# Altium PCB WL1800-E-D001-PrinterC Rev.2.0.PcbDoc (part 1 of 2)
Units mil, origin at the board's own origin, x right, y up, seen from the top; angles counter-clockwise.
Board outline 5519 x 3937.77 mil, 2 copper layers (Top Layer, Bottom Layer); 232 components, 142 nets, 822 pads, 384 vias.
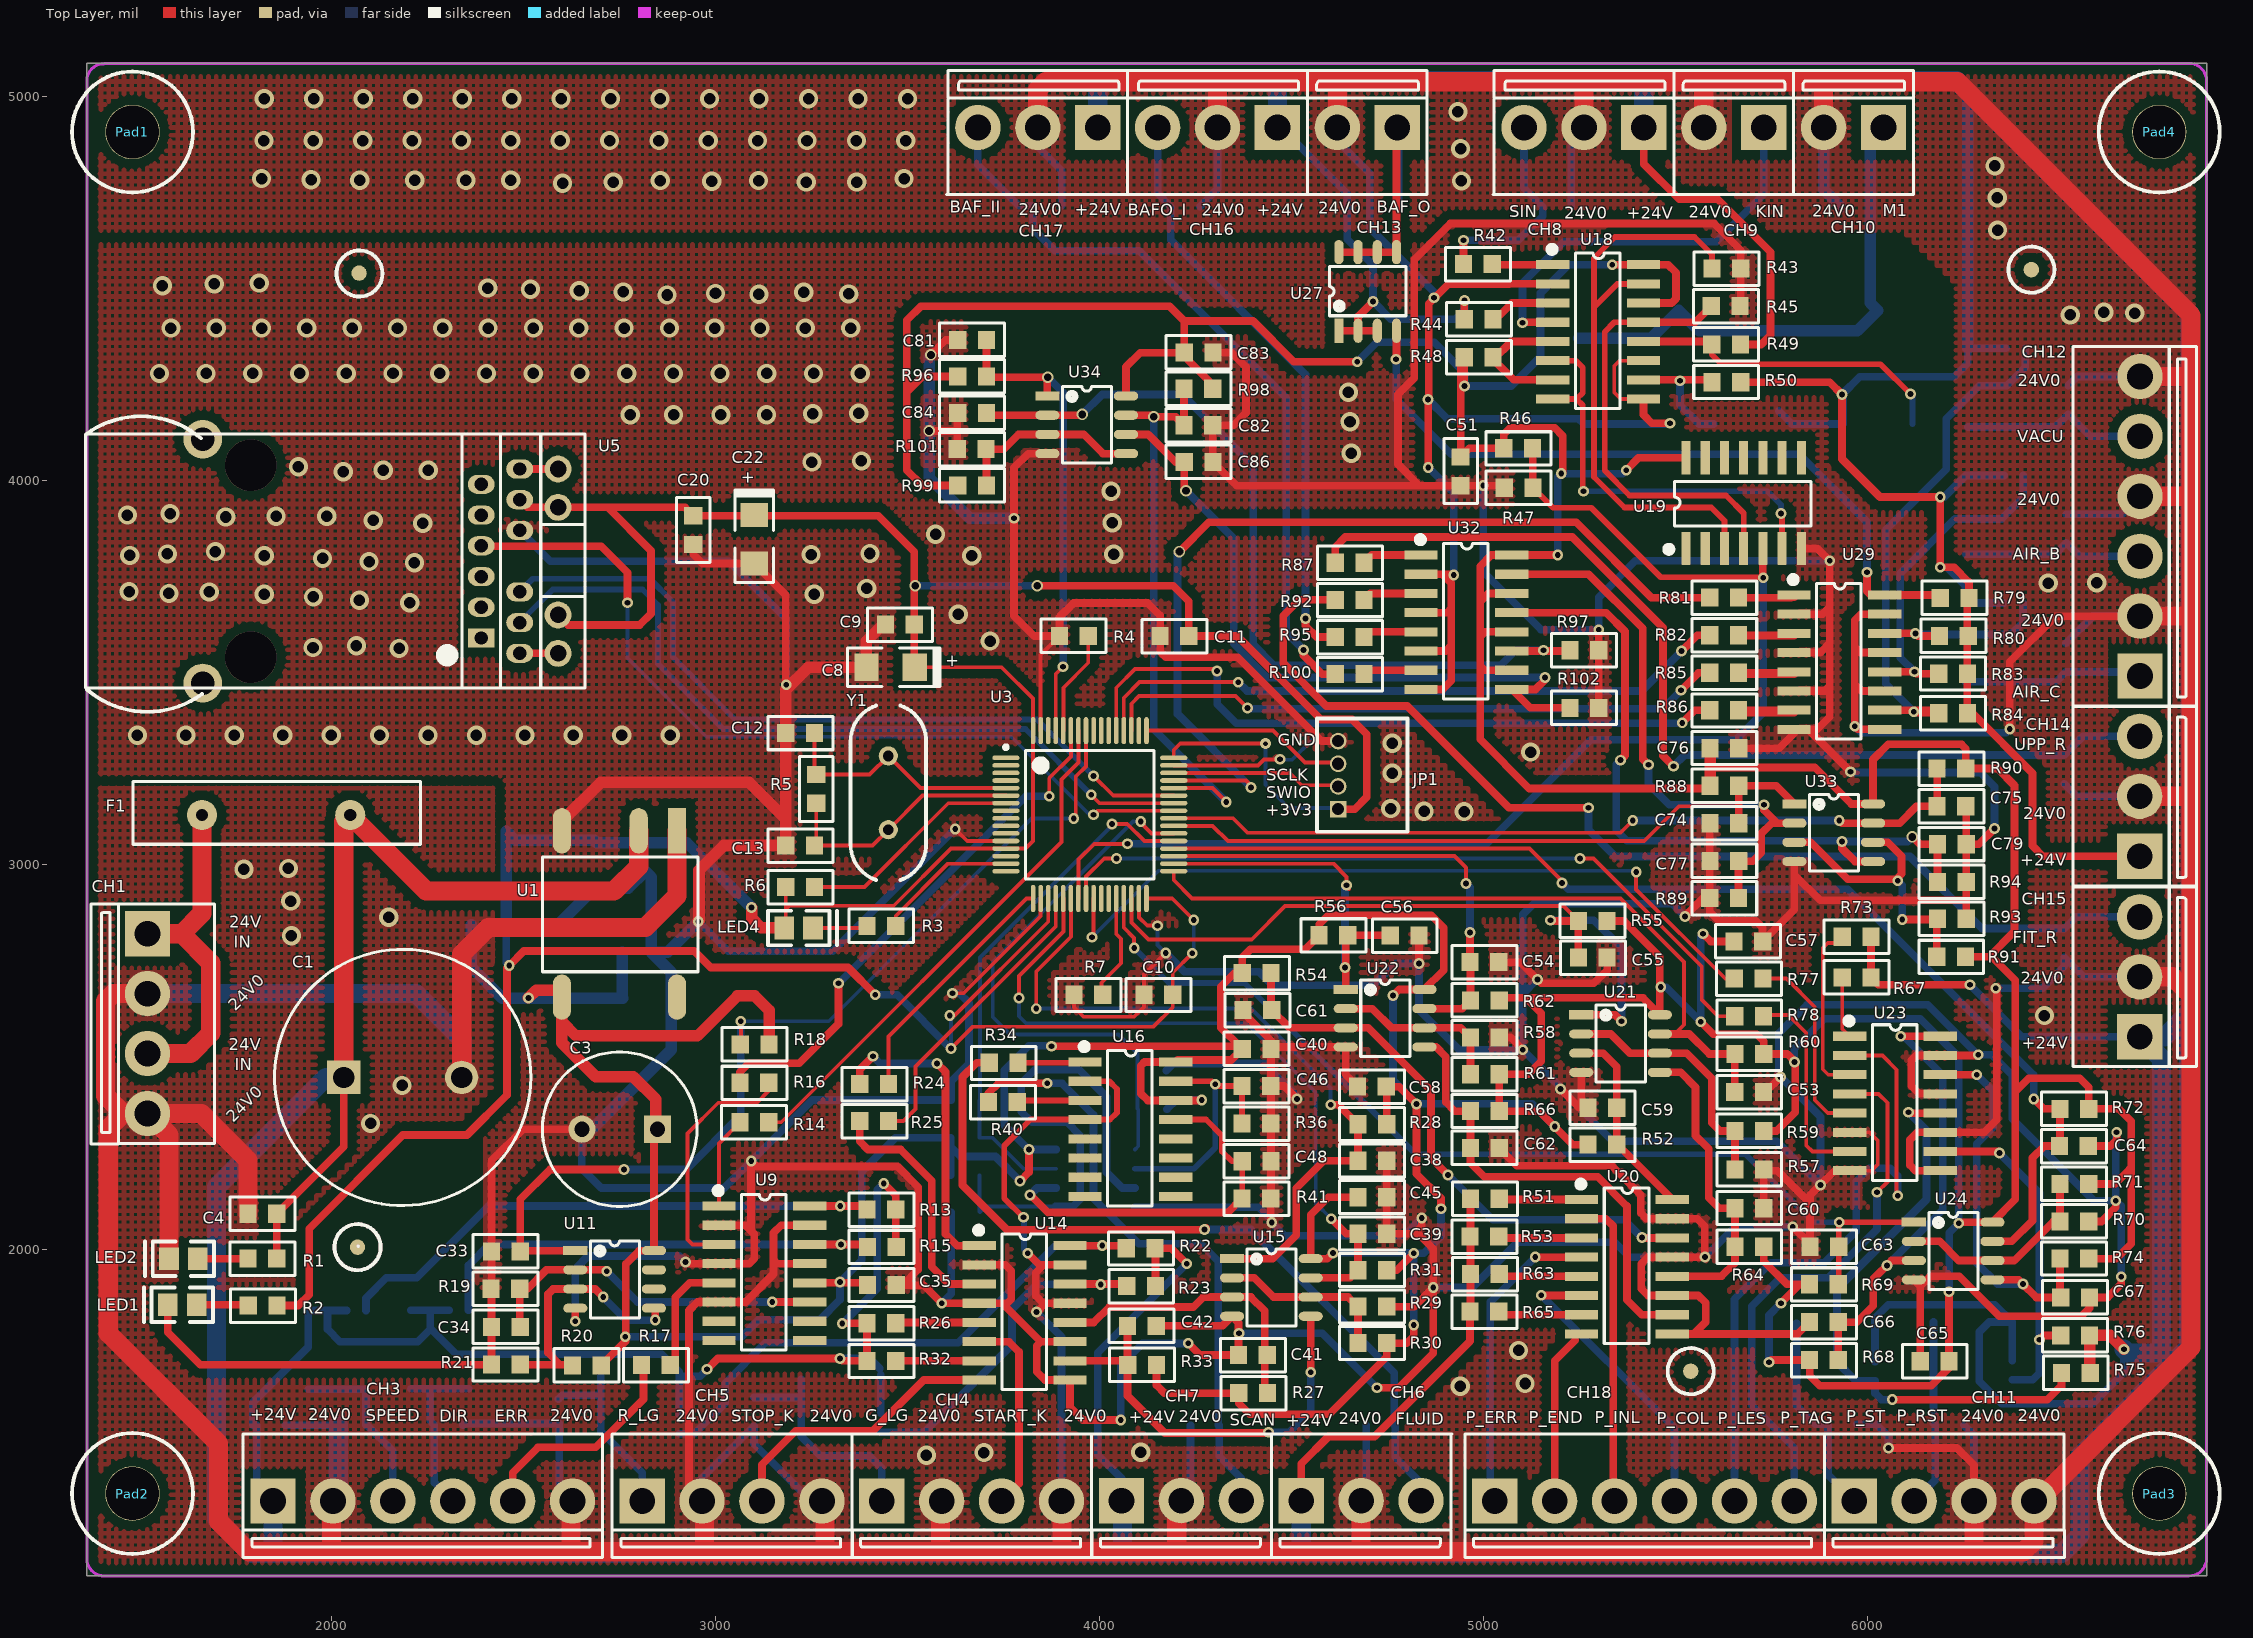
[diagram p0: Top Layer view]
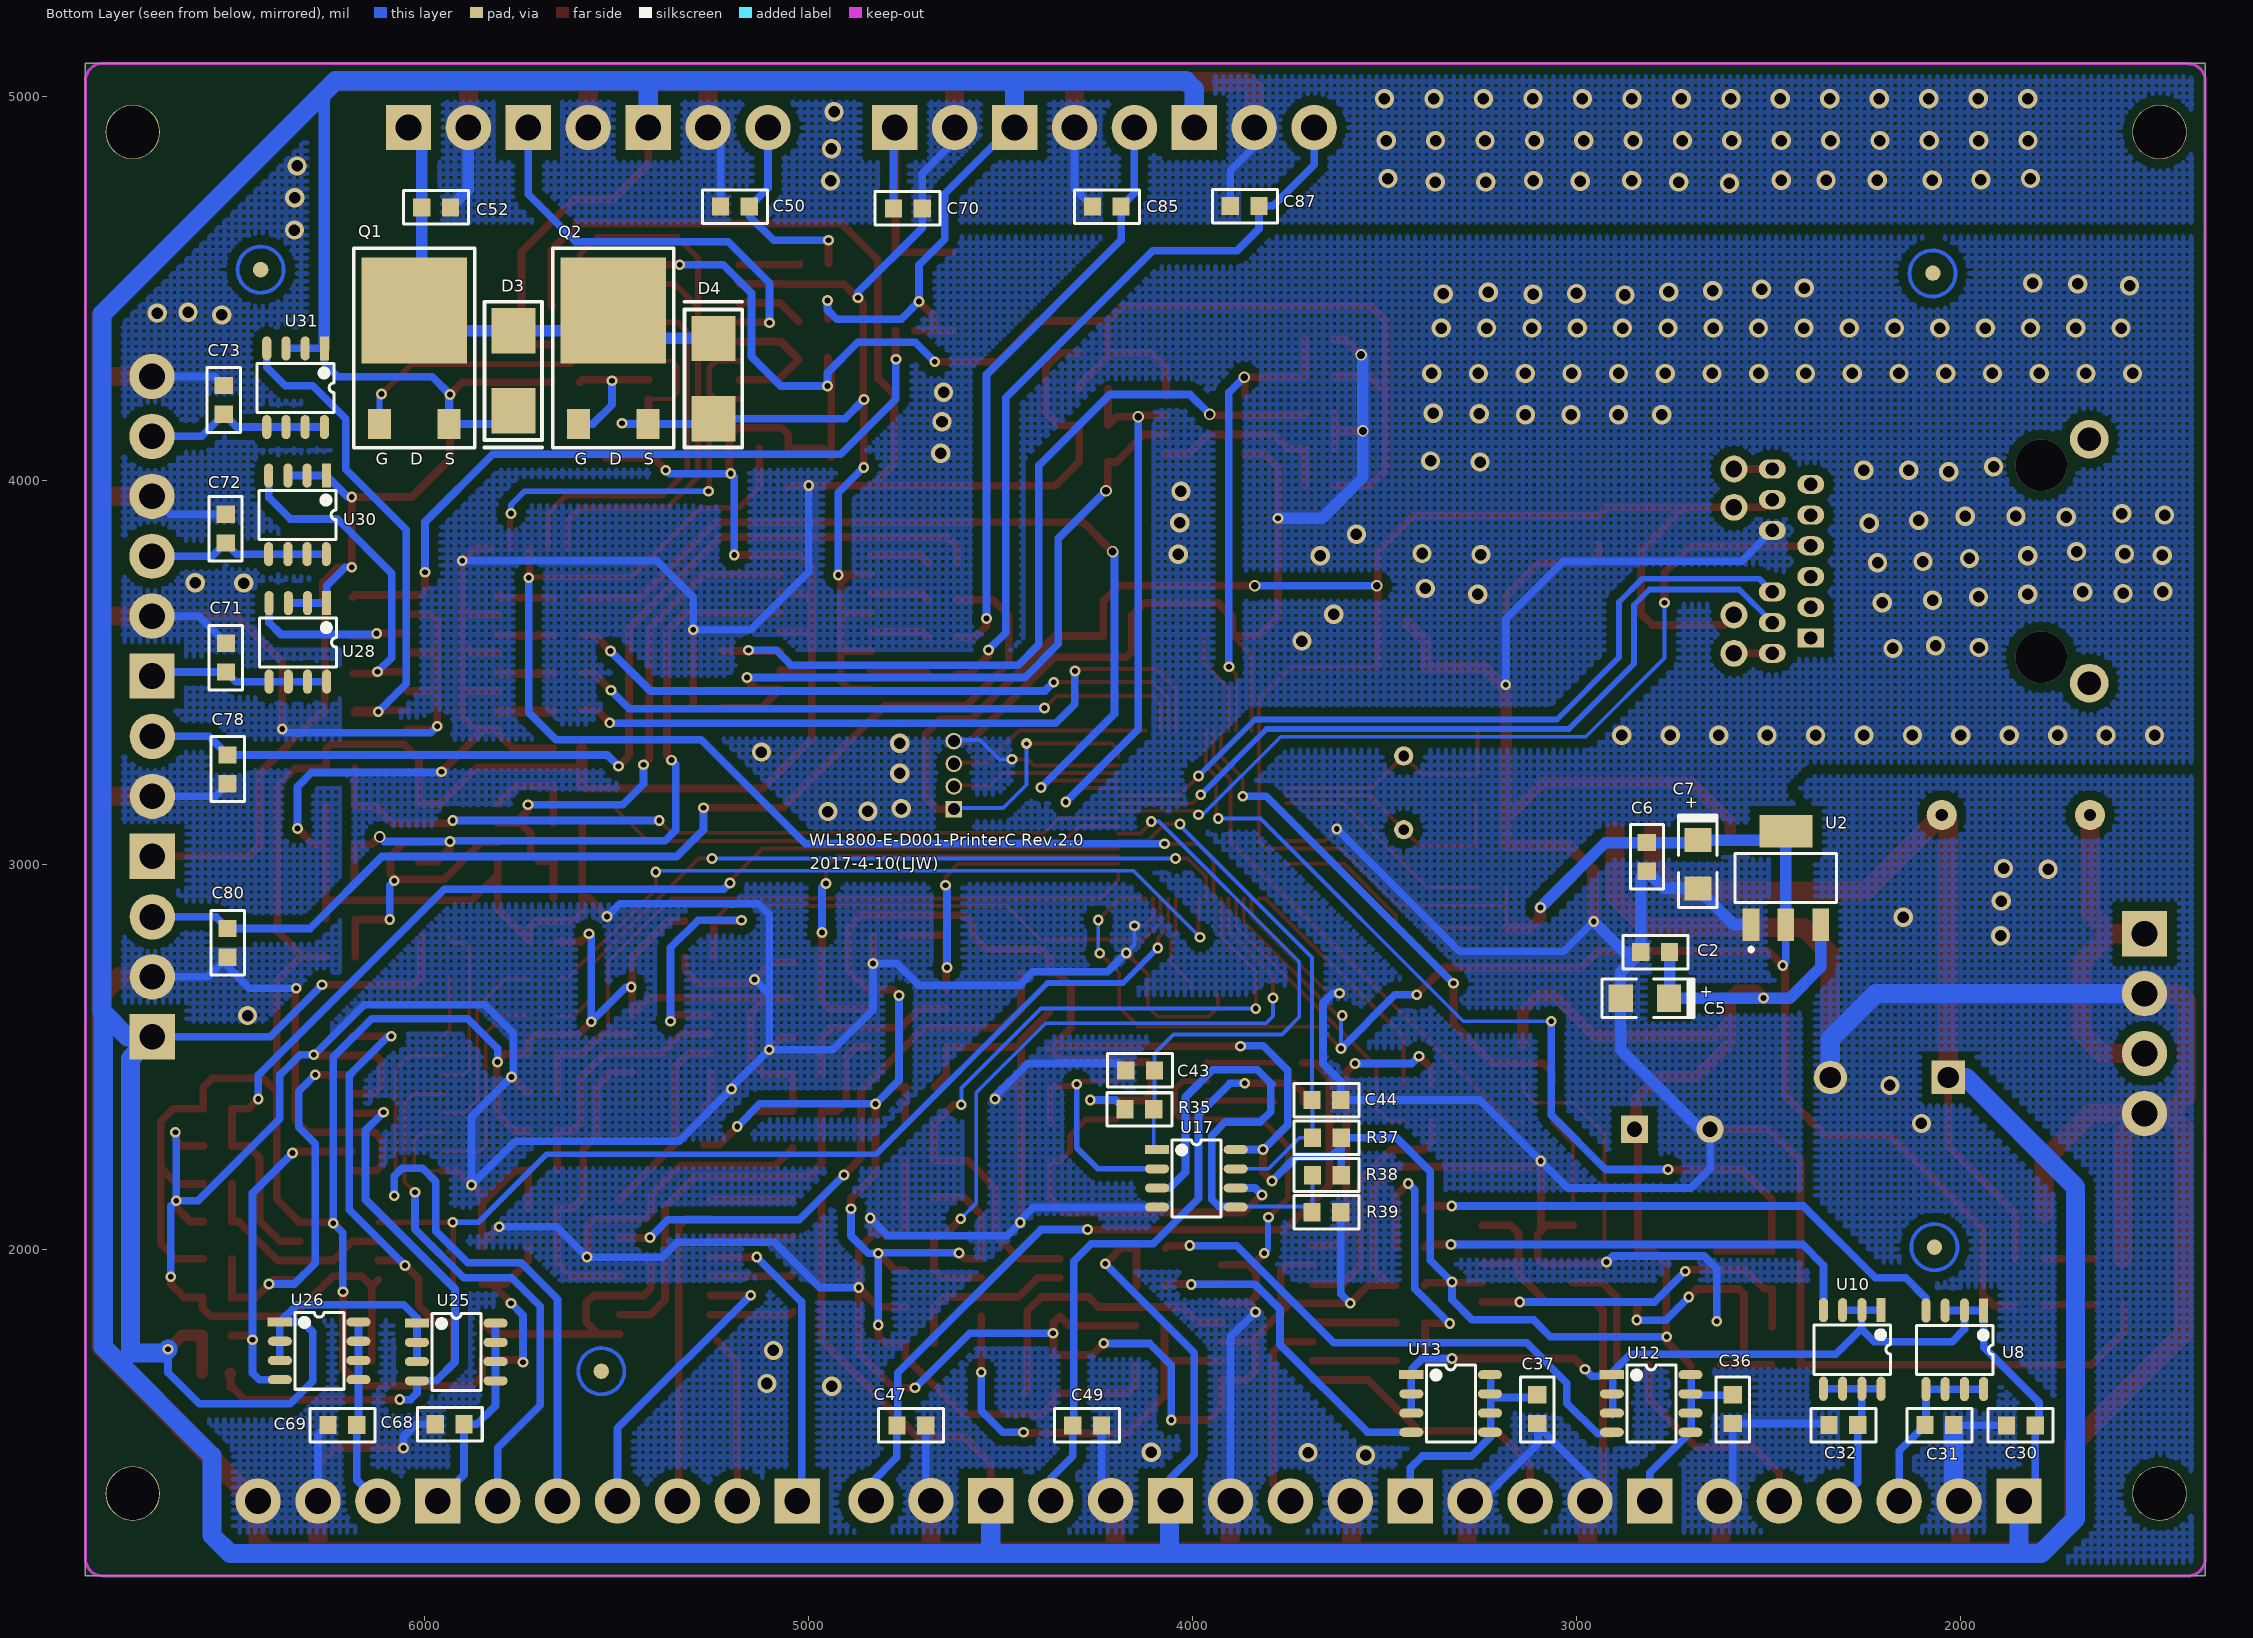
[diagram p1: Bottom Layer view, seen from below]

## Layer stack, top to bottom
Top Solder: solder mask 0.4, Solder Resist, Dk 3.5
Top Layer: signal copper 1.4
Dielectric 1: dielectric 12.6, FR-4, Dk 4.8
Bottom Layer: signal copper 1.4
Bottom Solder: solder mask 0.4, Solder Resist, Dk 3.5

## Board outline
1363,1149 1363,5086.77 6882,5086.77 6882,1149

## Design rules (kind name [scope] priority, off if disabled: settings)
Clearance Clearance_1 [InPolygon] p1: gap=23.62
Clearance [All] p2: gap=6
ComponentClearance [All] p1: gap=0 collisioncheckmode=3 verticalgap=0 showdistances=FALSE
PolygonConnect [All] p1: connectstyle=Direct reliefconductorwidth=10 reliefentries=4 polygonreliefangle="90 Angle" airgapwidth=10
RoutingVias [All] p1: holewidth=28 width=50 viastyle="Through Hole" minholewidth=28 minwidth=50 maxholewidth=28 maxwidth=50
SolderMaskExpansion [All] p1: expansion=4
Width [All] p1: maxlimit=236.22 minlimit=10 preferedwidth=236.22
28 further rules are at their usual default settings.

## Classes and differential pairs
component class roll_motorl_control: C50 C51 C52 CH8 CH9 CH10 D3 D4 Q1 Q2 R42 R43 R44 R45 R46 R47 R48 R49 R50 U18 U19
component class printer_control: C53 C54 C55 C56 C57 C58 C59 C60 C61 C62 C63 C64 C65 C66 C67 C68 C69 CH11 CH18 R51 R52 R53 R54 R55 R56 R57 R58 R59 R60 R61 R62 R63 R64 R65 R66 R67 R68 R69 R70 R71 R72 R73 R74 R75 R76 R77 R78 U20 U21 U22 U23 U24 U25 U26
component class power: C1 C2 C3 C4 C5 C6 C7 CH1 F1 LED1 LED2 R1 R2 U1 U2
component class light_key_control: C36 C37 C38 C39 C40 C41 C42 C43 C44 C45 C46 C47 C48 C49 CH4 CH5 CH6 CH7 R22 R23 R24 R25 R26 R27 R28 R29 R30 R31 R32 R33 R34 R35 R36 R37 R38 R39 R40 R41 U12 U13 U14 U15 U16 U17
component class cpu: C8 C9 C10 C11 C12 C13 JP1 LED4 Pad1 Pad2 Pad3 Pad4 R3 R4 R5 R6 R7 U3 Y1
component class communition: C20 C22 U5
component class belt_motor_control: C30 C31 C32 C33 C34 C35 CH3 R13 R14 R15 R16 R17 R18 R19 R20 R21 U8 U9 U10 U11
component class air_cylinder_control: C70 C71 C72 C73 C74 C75 C76 C77 C78 C79 C80 C81 C82 C83 C84 C85 C86 C87 CH12 CH13 CH14 CH15 CH16 CH17 R79 R80 R81 R82 R83 R84 R85 R86 R87 R88 R89 R90 R91 R92 R93 R94 R95 R96 R97 R98 R99 R100 R101 R102 U27 U28 U29 U30 U31 U32 U33 U34

## Components (designator, comment, footprint, x,y, rotation, side; value= is the part's Value field where it differs from the comment)
C1 "C_2200uF" C7.8*17 2032,2447 r0 top
C2 "Capb" 0805 2795,2773 r180 bottom
C3 "C_2200uF" C5*10 2849,2312 r180 top
C4 "Cap" 0805 1820,2092 r0 top
C5 "Cap Pol3b" "CAP A-3216" 2822,2653 r0 bottom
C6 "Capb" 0805 2817,3021 r90 bottom
C7 "Cap Pol3b" "CAP A-3216" 2684,3002 r270 bottom
C8 "Cap Pol3" "CAP A-3216" 3456,3515 r180 top
C9 "Cap" 0805 3480,3626 r0 top
C10 "Cap" 0805 4153,2662 r0 top
C11 "Cap" 0805 4195,3596 r0 top
C12 "Cap" 0805 3220.46,3344 r0 top
C13 "Cap" 0805 3220.46,3051 r0 top
C20 "Cap" 0805 2942,3872 r90 top
C22 "Cap Pol3" "CAP A-3216" 3101,3848 r270 top
C30 "Capb" 0805 1843,1541 r0 bottom
C31 "Capb" 0805 2055,1542 r180 bottom
C32 "Capb" 0805 2305,1542 r180 bottom
C33 "Cap" 0805 2454,1994 r180 top
C34 "Cap" 0805 2454,1797.33 r180 top
C35 "Cap" 0805 3433,1906 r180 top
C36 "Capb" 0805 2593,1583 r270 bottom
C37 "Capb" 0805 3102,1583 r270 bottom
C38 "Cap" 0805 4710,2230 r180 top
C39 "Cap" 0805 4710,2040 r180 top
C40 "Cap" 0805 4409,2521 r180 top
C41 "Cap" 0805 4399,1724 r0 top
C42 "Cap" 0805 4110,1800 r180 top
C43 "Capb" 0805 4136,2465 r0 bottom
C44 "Capb" 0805 3651,2388 r180 bottom
C45 "Cap" 0805 4710,2135 r180 top
C46 "Cap" 0805 4408,2424.5 r0 top
C47 "Capb" 0805 4732,1541 r0 bottom
C48 "Cap" 0805 4409,2228.5 r180 top
C49 "Capb" 0805 4274,1541 r0 bottom
C50 "Capb" 0805 5191,4714 r180 bottom
C51 "Cap" 0805 4940,4025 r90 top
C52 "Capb" 0805 5969,4712 r0 bottom
C53 "Cap" 0805 5691,2408.6 r0 top
C54 "Cap" 0805 5002,2747 r0 top
C55 "Cap" 0805 5284,2759 r0 top
C56 "Cap" 0805 4794,2816 r0 top
C57 "Cap" 0805 5689,2801 r180 top
C58 "Cap" 0805 4709,2423 r0 top
C59 "Cap" 0805 5309,2368 r0 top
C60 "Cap" 0805 5692,2106.4 r180 top
C61 "Cap" 0805 4411,2622 r0 top
C62 "Cap" 0805 5003,2263 r180 top
C63 "Cap" 0805 5887,2006 r180 top
C64 "Cap" 0805 6537,2268.2 r0 top
C65 "Cap" 0805 6174,1708 r0 top
C66 "Cap" 0805 5886,1809.67 r0 top
C67 "Cap" 0805 6540,1874 r180 top
C68 "Capb" 0805 5934,1544 r180 bottom
C69 "Capb" 0805 6213,1542 r180 bottom
C70 "Capb" 0805 4741,4709 r0 bottom
C71 "Capb" 0805 6516,3540 r270 bottom
C72 "Capb" 0805 6517,3876 r270 bottom
C73 "Capb" 0805 6522,4211 r270 bottom
C74 "Cap" 0805 5627,3108.5 r180 top
C75 "Cap" 0805 6218,3153 r0 top
C76 "Cap" 0805 5627,3304 r180 top
C77 "Cap" 0805 5627,3010.75 r180 top
C78 "Capb" 0805 6512,3249 r90 bottom
C79 "Cap" 0805 6219,3054 r180 top
C80 "Capb" 0805 6512,2797 r90 bottom
C81 "Cap" 0805 3668,4367 r180 top
C82 "Cap" 0805 4257,4145 r0 top
C83 "Cap" 0805 4258,4334 r180 top
C84 "Cap" 0805 3668,4177 r180 top
C85 "Capb" 0805 4223,4714 r180 bottom
C86 "Cap" 0805 4258,4049 r180 top
C87 "Capb" 0805 3864,4716 r180 bottom
CH1 "HEADER1X4" CH3.96-4PIN 1521,2821 r270 top
CH3 "HEADER1X6" CH3.96-6PIN 1848,1345 r0 top locked
CH4 "HEADER1X4" CH3.96-4PIN 3433,1344 r0 top locked
CH5 "HEADER1X4" CH3.96-4PIN 2809,1344 r0 top locked
CH6 "HEADER1X3" CH3.96-3PIN 4525,1345 r0 top locked
CH7 "HEADER1X3" CH3.96-3PIN 4057,1345 r0 top locked
CH8 "HEADER1X3" CH3.96-3PIN 5417,4920 r180 top locked
CH9 "HEADER1X2" CH3.96-2PIN 5729,4920 r180 top locked
CH10 "HEADER1X2" CH3.96-2PIN 6041,4920 r180 top locked
CH11 "HEADER1X4" CH3.96-4PIN 5965,1344 r0 top locked
CH12 "HEADER1X6" CH3.96-6PIN 6708,3492 r90 top
CH13 "HEADER1X2" CH3.96-2PIN 4775,4920 r180 top locked
CH14 "HEADER1X3" CH3.96-3PIN 6708,3023 r90 top
CH15 "HEADER1X3" CH3.96-3PIN 6708,2553 r90 top
CH16 "HEADER1X3" CH3.96-3PIN 4463,4920 r180 top locked
CH17 "HEADER1X3" CH3.96-3PIN 3995,4920 r180 top locked
CH18 "HEADER1X6" CH3.96-6PIN 5029,1345 r0 top locked
D3 "1N5822(SS34)b" SMA 5768,4390.9 r270 bottom (schematic designator D2)
D4 "1N5822(SS34)b" SMA 5247,4162.24 r90 bottom (schematic designator D3)
F1 "X30_UF500" X30UF600 1663,3130 r0 top
JP1 "4 HEADER" CON4_1.5 4621,3234 r90 top
LED1 "" LED-0805 1649,1855 r180 top
LED2 "" LED-0805 1652,1975 r180 top
LED4 "Ready" LED-0805 3179,2836 r0 top
Pad1 "Pad" pad35 1481,4908.46 r0 top
Pad2 "Pad" pad35 1481,1363.46 r0 top
Pad3 "Pad" pad35 6758,1363.46 r0 top
Pad4 "Pad" pad35 6758,4908.46 r0 top
Q1 "FR5305 (PMOS-2)b" TO-252 6026,4296 r180 bottom
Q2 "FR4105 (NMOS-2)b" TO-252 5508,4296 r180 bottom
R1 "Res2" 0805 1820,1975 r0 top
R2 "Res2" 0805 1821,1853 r0 top
R3 "Res2" 0805 3432,2841 r180 top
R4 "Res2" 0805 3933,3596 r180 top
R5 "Res2" 0805 3262.46,3198 r270 top
R6 "Res2" 0805 3220.46,2943 r0 top
R7 "Res2" 0805 3971,2662 r0 top
R13 "Res2" 0805 3432,2103 r0 top
R14 "Res2" 0805 3101,2330 r180 top
R15 "Res2" 0805 3433,2005 r180 top
R16 "Res2" 0805 3101,2433 r0 top
R17 "Res2" 0805 2845,1698 r0 top
R18 "Res2" 0805 3102,2533 r180 top
R19 "Res2" 0805 2453,1896.67 r0 top
R20 "Res2" 0805 2665,1697 r180 top
R21 "Res2" 0805 2454,1699 r180 top
R22 "Res2" 0805 4107,2002 r0 top
R23 "Res2" 0805 4108,1904 r0 top
R24 "Res2" 0805 3413,2430 r0 top
R25 "Res2" 0805 3413,2333 r0 top
R26 "Res2" 0805 3432,1807 r0 top
R27 "Res2" 0805 4400,1625 r0 top
R28 "Res2" 0805 4710,2325 r180 top
R29 "Res2" 0805 4710,1850 r180 top
R30 "Res2" 0805 4710,1755 r180 top
R31 "Res2" 0805 4710,1945 r180 top
R32 "Res2" 0805 3432,1709 r0 top
R33 "Res2" 0805 4111,1698 r180 top
R34 "Res2" 0805 3750,2485 r0 top
R35 "Res2b" 0805 4138,2364 r180 bottom
R36 "Res2" 0805 4408,2327 r0 top
R37 "Res2b" 0805 3650,2289.67 r0 bottom
R38 "Res2b" 0805 3650,2192.33 r0 bottom
R39 "Res2b" 0805 3651,2096 r180 bottom
R40 "Res2" 0805 3748,2383 r0 top
R41 "Res2" 0805 4408,2132 r0 top
R42 "Res2" 0805 4985,4565 r0 top
R43 "Res2" 0805 5632,4553 r0 top
R44 "Res2" 0805 4987,4421 r0 top
R45 "Res2" 0805 5630,4455 r0 top
R46 "Res2" 0805 5090,4085 r0 top
R47 "Res2" 0805 5091,3982 r180 top
R48 "Res2" 0805 4987,4322 r0 top
R49 "Res2" 0805 5631,4355 r180 top
R50 "Res2" 0805 5632,4257 r180 top
R51 "Res2" 0805 5003,2131 r0 top
R52 "Res2" 0805 5309,2272 r0 top
R53 "Res2" 0805 5002,2033 r0 top
R54 "Res2" 0805 4409,2719 r0 top
R55 "Res2" 0805 5284,2854 r180 top
R56 "Res2" 0805 4609,2817 r0 top
R57 "Res2" 0805 5692,2206.8 r180 top
R58 "Res2" 0805 5003,2551 r180 top
R59 "Res2" 0805 5692,2307.2 r180 top
R60 "Res2" 0805 5692,2508 r180 top
R61 "Res2" 0805 5003,2455 r180 top
R62 "Res2" 0805 5003,2647 r180 top
R63 "Res2" 0805 5003,1935 r0 top
R64 "Res2" 0805 5692,2006 r180 top
R65 "Res2" 0805 5002,1837 r0 top
R66 "Res2" 0805 5003,2359 r180 top
R67 "Res2" 0805 5971,2707 r180 top
R68 "Res2" 0805 5886,1711 r0 top
R69 "Res2" 0805 5886,1908.33 r0 top
R70 "Res2" 0805 6538,2071.6 r180 top
R71 "Res2" 0805 6538,2169.4 r180 top
R72 "Res2" 0805 6538,2365 r180 top
R73 "Res2" 0805 5971,2813 r180 top
R74 "Res2" 0805 6538,1975 r180 top
R75 "Res2" 0805 6542,1677 r180 top
R76 "Res2" 0805 6540,1775 r180 top
R77 "Res2" 0805 5690,2704 r0 top
R78 "Res2" 0805 5691,2606 r0 top
R79 "Res2" 0805 6226,3695 r180 top
R80 "Res2" 0805 6224,3596 r180 top
R81 "Res2" 0805 5626,3696 r0 top
R82 "Res2" 0805 5626,3598.25 r0 top
R83 "Res2" 0805 6222,3498 r180 top
R84 "Res2" 0805 6222,3395 r180 top
R85 "Res2" 0805 5626,3500.5 r0 top
R86 "Res2" 0805 5626,3402.75 r0 top
R87 "Res2" 0805 4651,3787 r0 top
R88 "Res2" 0805 5627,3206.25 r180 top
R89 "Res2" 0805 5626,2914 r0 top
R90 "Res2" 0805 6218,3251 r0 top
R91 "Res2" 0805 6217,2761 r0 top
R92 "Res2" 0805 4651,3690.33 r0 top
R93 "Res2" 0805 6219,2860 r180 top
R94 "Res2" 0805 6219,2956 r180 top
R95 "Res2" 0805 4651,3593.67 r0 top
R96 "Res2" 0805 3668,4272 r180 top
R97 "Res2" 0805 5262,3559 r180 top
R98 "Res2" 0805 4257,4240 r0 top
R99 "Res2" 0805 3668,3988 r180 top
R100 "Res2" 0805 4651,3497 r0 top
R101 "Res2" 0805 3667,4083 r0 top
R102 "Res2" 0805 5262,3409 r180 top
U1 "B2405XT-2WR2" B2405XT-2WR2 2900,3089 r270 top
U2 "AMS1117-3.3b" SOT223 2455,2966 r180 bottom
U3 "STM32F103RBT6" LQFP64 3756,3279 r0 top
U5 "USR-K3" USR-K3 2390,3591 r180 top
U8 "CEM4435Ab" SOP8-OP27 1940,1840 r270 bottom
U9 "TLP280-4" SO16 3127,1937 r0 top
U10 "CEM4435Ab" SOP8-OP27 2207,1841 r270 bottom
U11 "LM293" SOP8-OP27 2635,1996 r0 top
U12 "CEM4435Ab" SOP8-OP27 2908,1673 r180 bottom
U13 "CEM4435Ab" SOP8-OP27 3430,1673 r180 bottom
U14 "TLP280-4" SO16 3805,1834 r0 top
U15 "LM293" SOP8-OP27 4345,1975 r0 top
U16 "TLP280-4" SO16 4080,2312 r0 top
U17 "LM293b" SOP8-OP27 4092,2259 r180 bottom
U18 "TLP280-4" SO16 5298,4388 r0 top
U19 "74HC10" SO14 5677,3942 r90 top
U20 "TLP280-4" SO16 5373,1954 r0 top
U21 "LM293" SOP8-OP27 5254,2610 r0 top
U22 "LM293" SOP8-OP27 4641,2676 r0 top
U23 "TLP280-4" SO16 6071,2379 r0 top
U24 "LM293" SOP8-OP27 6120,2070 r0 top
U25 "CEM4435Ab" SOP8-OP27 6019,1807 r180 bottom
U26 "CEM4435Ab" SOP8-OP27 6376,1810 r180 bottom
U27 "CEM4435A" SOP8-OP27 4623,4391 r90 top
U28 "CEM4435Ab" SOP8-OP27 6254,3682 r270 bottom
U29 "TLP280-4" SO16 5926,3528 r0 top
U30 "CEM4435Ab" SOP8-OP27 6255,4014 r270 bottom
U31 "CEM4435Ab" SOP8-OP27 6260,4345 r270 bottom
U32 "TLP280-4" SO16 4955,3632 r0 top
U33 "LM293" SOP8-OP27 5809,3159 r0 top
U34 "LM293" SOP8-OP27 3864,4221 r0 top
Y1 "8MHz" XTAL_US 3450,3284 r270 top

## Footprints (in the part's own frame and the unit in brackets; to place one, negate y for a bottom-side part, rotate by r counter-clockwise, add the part's x,y. Pads: shape width x height; smd on the part's side, far side on the other; paste and mask are expansions set on the pad)
0805 [mm] "1.14mm,1.2mm,3.05mm"
  rect 1.14x1.2 smd: 1(-0.95,0) 2(0.95,0)
  silkscreen extent -2.13,-1.12 2.16,1.09
B2405XT-2WR2 [mm]
  rect 3x1.2 smd: 1(0,0)
  oval 3x1.2 smd: 2(0,-2.54) 4(0,-7.62) 5(11,-7.62) 8(11,0)
  silkscreen extent 1.73,-8.89 9.32,1.37
C5*10 [mm]
  rect 1.8x1.8 hole 1: 1(0,0)
  round 1.8 hole 1: 2(5,0)
  silkscreen extent -2.62,-5.11 7.62,5.11
C7.8*17 [mm]
  rect 2.2x2.2 hole 1.4: 1(0,0)
  round 2.2 hole 1.4: 2(7.8,0)
  silkscreen extent -4.57,-8.47 12.37,8.47
"CAP A-3216" [mm]
  rect 1.6x1.8 smd: 1(-1.6,0) 2(1.6,0)
  silkscreen extent -3.25,-1.27 2.85,1.27
CH3.96-2PIN [mm]
  rect 3x3 hole 1.7: 1(0,0)
  round 3 hole 1.7: 2(3.96,0)
  silkscreen extent -1.98,-3.76 5.94,4.42
CH3.96-3PIN [mm]
  rect 3x3 hole 1.7: 1(0,0)
  round 3 hole 1.7: 2(3.96,0) 3(7.92,0)
  silkscreen extent -1.98,-3.76 9.98,4.42
CH3.96-4PIN [mm]
  rect 3x3 hole 1.7: 1(0,0)
  round 3 hole 1.7: 2(3.96,0) 3(7.92,0) 4(11.887,0)
  silkscreen extent -1.98,-3.73 13.89,4.45
CH3.96-6PIN [mm]
  rect 3x3 hole 1.7: 1(0,-0.025)
  round 3 hole 1.7: 2(3.96,-0.025) 3(7.92,-0.025) 4(11.887,-0.025) 5(15.847,-0.025) 6(19.807,-0.025)
  silkscreen extent -1.98,-3.76 21.79,4.42
CON4_1.5 [mm]
  rect 1.1x1.1 hole 0.8: 1(-2.25,0)
  round 1.1 hole 0.8: 2(-0.75,0) 3(0.75,0) 4(2.25,0)
  silkscreen extent -3.75,-4.6 3.75,1.4
LED-0805 [mm]
  rect 1.3x1.5 smd: 1(0,0) 2(1.9,0)
  silkscreen extent -1.08,-1.14 3.49,1.14
LQFP64 [mm] "Thin QFP, 64-Leads, Body 10x10mm, Pitch 0.5mm, IPC Medium Density"
  oval 1.8x0.3 smd: 1(0,0) 2(0,-0.5) 3(0,-1) 4(0,-1.5) 5(0,-2) 6(0,-2.5) 7(0,-3) 8(0,-3.5) 9(0,-4) 10(0,-4.5) 11(0,-5) 12(0,-5.5) 13(0,-6) 14(0,-6.5) 15(0,-7) 16(0,-7.5) 33(11.1,-7.5) 34(11.1,-7) 35(11.1,-6.5) 36(11.1,-6) 37(11.1,-5.5) 38(11.1,-5) 39(11.1,-4.5) 40(11.1,-4) 41(11.1,-3.5) 42(11.1,-3) 43(11.1,-2.5) 44(11.1,-2) 45(11.1,-1.5) 46(11.1,-1) 47(11.1,-0.5) 48(11.1,0)
  oval 0.3x1.8 smd: 17(1.8,-9.3) 18(2.3,-9.3) 19(2.8,-9.3) 20(3.3,-9.3) 21(3.8,-9.3) 22(4.3,-9.3) 23(4.8,-9.3) 24(5.3,-9.3) 25(5.8,-9.3) 26(6.3,-9.3) 27(6.8,-9.3) 28(7.3,-9.3) 29(7.8,-9.3) 30(8.3,-9.3) 31(8.8,-9.3) 32(9.3,-9.3) 49(9.3,1.8) 50(8.8,1.8) 51(8.3,1.8) 52(7.8,1.8) 53(7.3,1.8) 54(6.8,1.8) 55(6.3,1.8) 56(5.8,1.8) 57(5.3,1.8) 58(4.8,1.8) 59(4.3,1.8) 60(3.8,1.8) 61(3.3,1.8) 62(2.8,1.8) 63(2.3,1.8) 64(1.8,1.8)
  silkscreen extent -0.12,-8 9.8,0.82, body extent 0.55,-8.75 10.55,1.25, height 1.6
pad35 [mm]
  round 3.6 hole 3.5: 1(0.025,0)
  silkscreen extent -3.97,-4 4.03,4
SMA [mm]
  rect 3x2.9 smd: 1(0,0) 2(5.3,0)
  silkscreen extent -1.92,-1.91 7.73,1.91
SO14 [mm] "Wide = 6mm"
  rect 2.2x0.6 smd: 1(-3,3.81) 2(-3,2.54) 3(-3,1.27) 4(-3,0) 5(-3,-1.27) 6(-3,-2.54) 7(-3,-3.81) 8(3,-3.81) 9(3,-2.54) 10(3,-1.27) 11(3,0) 12(3,1.27) 13(3,2.54) 14(3,3.81)
  silkscreen extent -3.23,-4.44 1.45,5.13
SO16 [mm] "Wide = 6mm"
  rect 2.2x0.6 smd: 1(-3,4.445) 2(-3,3.175) 3(-3,1.905) 4(-3,0.635) 5(-3,-0.635) 6(-3,-1.905) 7(-3,-3.175) 8(-3,-4.445) 9(3,-4.445) 10(3,-3.175) 11(3,-1.905) 12(3,-0.635) 13(3,0.635) 14(3,1.905) 15(3,3.175) 16(3,4.445)
  silkscreen extent -3.23,-5.08 1.45,5.64
SOP8-OP27 [mm]
  rect 1.6x0.6 smd: 1(0,0)
  oval 1.6x0.6 smd: 2(0,-1.27) 3(0,-2.54) 4(0,-3.81) 5(5.2,-3.81) 6(5.2,-2.54) 7(5.2,-1.27) 8(5.2,0)
  silkscreen extent 0.99,-4.45 4.24,0.63
SOT223 [mm] "SOT-223/SC-73; 4 Leads; Body 6.7 x 7.3 mm, inc. leads (LxW max)"
  rect 1.1x2.15 smd: 1(-2.3,-3.1) 2(0,-3.1) 3(2.3,-3.1)
  rect 3.5x2.15 smd: 4(0,3.1)
  silkscreen extent -3.35,-4.85 3.35,1.63
TO-252 [mm]
  rect 1.5x2 smd: 1(-2.3,-3.75) 3(2.3,-3.75)
  rect 7x7 smd: 2(0,3.75)
  silkscreen extent -4,-5.32 4,7.87
USR-K3 [mil]
  rect 70x50 hole 35: 1(0,0)
  oval 70x50 hole 35: 2(0,-80) 3(0,-160) 4(0,-240) 5(0,-320) 6(0,-400) 7(-100,40) 8(-100,-40) 9(-100,-120) 10(-100,-280) 11(-100,-360) 12(-100,-440)
  round 70 hole 43: 13(-200,40) 14(-200,-60) 15(-200,-340) 16(-200,-440)
  round 101.18 hole 61.81: 17(725,117.5) 17(725,-517.5)
  silkscreen extent -270,-577 1030,192
X30UF600 [mm]
  round 2 hole 0.8: 1(0,0) 2(9.804,0)
  silkscreen extent -4.57,-1.93 14.45,2.21
XTAL_US [mil]
  round 50 hole 28: 1(0,0) 2(192.13,0)
  silkscreen extent -131,-98 323,98

## Part data
C2 C6 C30 C31 C32 C36 C37 C43 C44 C47 C49 C50 C52 C68 C69 C70 C71 C72 C73 C78 C80 C85 C87: library part Cap, "Capacitor"
C4 C9 C10 C11 C12 C13 C20 C33 C34 C35 C38 C39 C40 C41 C42 C45 C46 C48 C51 C53 C54 C55 C56 C57 C58 C59 C60 C61 C62 C63 C64 C65 C66 C67 C74 C75 C76 C77 C79 C81 C82 C83 C84 C86: "Capacitor"
C5 C7: library part "Cap Pol3", "Polarized Capacitor (Surface Mount)"
C8 C22: "Polarized Capacitor (Surface Mount)"
D3 D4: library part "Diode 1N4148", "High Conductance Fast Diode"
F1: library part "Fuse 1", "Fuse"
JP1: "4 Pin Header"
LED1 LED2 LED4: library part LED2, "Typical RED, GREEN, YELLOW, AMBER GaAs LED"
Q1: library part PMOS-2, "P-Channel Power MOSFET"
Q2: library part NMOS-2, "N-Channel Power MOSFET"
R1 R2 R3 R4 R5 R6 R7 R13 R14 R15 R16 R17 R18 R19 R20 R21 R22 R23 R24 R25 R26 R27 R28 R29 R30 R31 R32 R33 R34 R36 R40 R41 R42 R43 R44 R45 R46 R47 R48 R49 R50 R51 R52 R53 R54 R55 R56 R57 R58 R59 R60 R61 R62 R63 R64 R65 R66 R67 R68 R69 R70 R71 R72 R73 R74 R75 R76 R77 R78 R79 R80 R81 R82 R83 R84 R85 R86 R87 R88 R89 R90 R91 R92 R93 R94 R95 R96 R97 R98 R99 R100 R101 R102: "Resistor"
R35 R37 R38 R39: library part Res2, "Resistor"
U2: library part AMS1117-5
U3: library part STM32F103RDT6
U8 U10 U12 U13 U25 U26 U28 U30 U31: library part CEM4435A
U9 U14 U16 U18 U20 U23 U29 U32: library part TLP521-4
U17: library part LM293
U19: "three input nand gain"
Y1: library part XTAL, "Crystal Oscillator"

## Free pads (board coordinates)
  round 40 smd: 0(2068,2005) 0(2072,4541) 0(5539,1682) 0(6426,4550)
  round 40 smd far side: 0(2068,2005) 0(2072,4541) 0(5539,1682) 0(6426,4550)
  round 120 on Top Solder: 1(2068,2005) 1(2073,4540) 1(5539,1682) 1(6426,4550)
  round 120 on Bottom Solder: 1(2068,2005) 1(2072,4540) 1(5539,1682) 1(6426,4550)

## Via types
v1: diameter 28, hole 15, Top Layer to Bottom Layer, 192 vias
v2: diameter 50, hole 30, Top Layer to Bottom Layer, 179 vias
v3: diameter 30, hole 20, Top Layer to Bottom Layer, 10 vias
v4: diameter 133.86, hole 133.86, Top Layer to Bottom Layer, 2 vias
v5: diameter 28, hole 12, Top Layer to Bottom Layer, 1 vias

## Nets (pads, with @x,y where several pads share a name; then routed paths per layer and width w, separated by ;. In a path a pad name is that pad's centre, name@x,y a point inside that pad or via, vN(x,y) a via of type N, cw(c..) or ccw(c..) an arc to the next point about the centre after c; other vN are vias at no path point)
24V0: C1.2 C4.1 C30.2 C31.2 C32.1 C36.2 C37.2 C47.1 C49.1 C50.1 C52.1 C68.1 C69.1 C70.1 C71.1 C72.1 C73.1 C78.1 C80.1 C85.1 C87.1 CH1.2 CH1.4 CH3.2 CH3.6 CH4.2 CH4.4 CH5.2 CH5.4 CH6.2 CH7.2 CH8.2 CH9.2 CH10.2 CH11.3 CH11.4 CH12.2 CH12.4 CH12.6 CH13.2 CH14.2 CH15.2 CH16.2 CH17.2 D4.1 LED2.2 Q2.3 U1.1 U9.6 U9.13 U9.15 U14.13 U14.15 U16.2 U16.4 U18.2 U18.9 U18.11 U23.9 U23.11 U29.9 U29.11 U29.13 U29.15 U32.2 U32.4 U32.6 U32.8 | length 31498.1
  Top Layer w10: U18.9@5416.11,4213 5357,4213 5340,4230 5340,4299 5354,4313 U18.11@5416.11,4313
  Top Layer w15: v1(3802,2083) 3802,2082 3752,2132 3752,2269 3820,2337 U16.4@3961.89,2337 4027,2337 4045,2355 4045,2417 4025,2437 U16.2@3961.89,2437
  Top Layer w20: CH5.2@2964.91,1344 2931,1377.91 2931,1840 2953,1862 U9.6@3008.89,1862 3078,1862 3151,1935 3151,1972 ; U9.13@3245.11,1962 3161,1962 3151,1972 ; U9.15@3245.11,2062 3171,2062 3151,2042 3151,1972 ; v1(3813,1989) 3843,1959 3855,1959 ; v1(3836,1836) 3859,1859 ; U14.13@3923.11,1859 3859,1859 ; U14.15@3923.11,1959 3855,1959 ; U32.8@4836.89,3457 4893,3457 4916,3480 4916,3572 ; U32.6@4836.89,3557 4901,3557 4916,3572 ; U32.4@4836.89,3657 4905,3657 4916,3668 ; U32.2@4836.89,3757 4920,3757 v1(4922,3755) ; v1(4856,4035) 4856,4211 v1(4855,4212) 4857,4214 4857,4461 4908,4512 5067,4512 5068,4513 U18.2@5179.89,4513 ; 4895,3755 4916,3734 4916,3668 ; U18.9@5416.11,4213 5416.11,4171.89 5438,4150 v1(5485,4150) ; U29.9@6044.11,3353 5974,3353 v1(5966,3361) 5966,3471 ; U29.11@6044.11,3453 5984,3453 5966,3471 ; U29.13@6044.11,3553 5981,3553 5966,3568 ; U29.15@6044.11,3653 5982,3653 5966,3637 5966,3568 ; v1(6054,1482) 6232,1482 6276.81,1437.19 CH11.3@6276.81,1344 ; U23.9@6189.11,2204 6124,2204 6109,2219 6109,2284 6129,2304 U23.11@6189.11,2304 6303,2304 6336,2337 6336,2676 v1(6333,2679) ; v1(6370,3354) 6370,3529 6488.91,3647.91 CH12.2@6709,3647.91 ; 3855,1959 3834,1938 3834,1878 3853,1859 3859,1859 ; 4916,3572 4916,3668 ; 5966,3471 5966,3568
  Top Layer w50: CH1.2@1521,2665.09 1432.09,2665.09 1412,2645 1412,2399 1458,2353 ; LED2.2@1577.2,1975 1577.2,2296.8 CH1.4@1521,2353 ; C4.1@1782.6,2092 1782.6,2231.4 1661,2353 CH1.4@1521,2353 ; CH3.2@2003.91,1344 2000,1340.09 2000,1212 ; C1.2@2339.09,2447 2339.09,2768.09 2408,2837 2817,2837 2900,2920 U1.1@2900,3089 ; CH3.6@2627.81,1344 2624,1340.19 2624,1212 ; CH5.2@2964.91,1344 2971,1337.91 2971,1212 ; CH5.4@3277,1344 3285,1336 3285,1212 ; CH4.2@3588.91,1344 3586,1341.09 3586,1212 ; CH17.2@3839.09,4920 3839.09,5019.09 3859,5039 4625,5039 ; CH4.4@3901,1344 3902,1343 3902,1212 ; CH7.2@4212.91,1345 4201,1333.09 4201,1212 ; CH16.2@4307.09,4920 4307.09,5036.09 ; CH13.2@4619.09,4920 4619.09,5033.09 4625,5039 ; CH6.2@4680.91,1345 4681,1344.91 4681,1212 ; CH8.2@5261.09,4920 5261.09,5028.09 5272,5039 ; CH9.2@5573.09,4920 5573.09,5037.09 5575,5039 ; CH10.2@5885.09,4920 5885.09,5038.09 5886,5039 ; CH11.3@6276.81,1344 6276.81,1212 ; CH15.2@6708,2708.91 6793.09,2708.91 6842,2660 ; CH14.2@6708,3178.91 6840.09,3178.91 6842,3177 ; CH12.2@6709,3647.91 6833.91,3647.91 6842,3656 ; CH12.4@6709,3960 6839,3960 6842,3957 ; CH12.6@6709,4271.81 6836.19,4271.81 6842,4266 ; 1458,2353 1419,2314 1419,1781 1706,1494 1706,1291 1785,1212 2000,1212 ; 1458,2353 CH1.4@1521,2353 ; 2000,1212 2624,1212 ; 2624,1212 2971,1212 ; 2971,1212 3285,1212 ; 3285,1212 3586,1212 ; 3586,1212 3902,1212 ; 3902,1212 4201,1212 ; 4201,1212 4681,1212 ; 4625,5039 5272,5039 ; 4681,1212 6276.81,1212 ; 5272,5039 5575,5039 ; 5575,5039 5886,5039 ; 5886,5039 6234,5039 6842,4431 6842,4266 ; 6276.81,1212 6405,1212 6433,1240 CH11.4@6433,1344 6442,1344 6842,1744 6842,2660 ; 6842,2660 6842,3177 ; 6842,3177 6842,3656 ; 6842,3656 6842,3957 ; 6842,3957 6842,4266
  Bottom Layer w15: v1(3802,2083) 3803,2082 3803,1999 v1(3813,1989)
  Bottom Layer w20: C30.2@1880.4,1541 1998.6,1541 C31.2@2007.6,1532 ; C32.1@2342.4,1542 2346,1545.6 C36.2@2593,1545.6 2593,1378.81 CH3.6@2627.81,1344 ; CH5.2@2956.91,1395.5 3100,1538.6 3100,1493 CH5.4@3269,1324 ; v1(3836,1836) 3901,1771 CH4.4@3901,1344 ; CH17.2@3839.09,4920 3839.09,4869.91 3901.4,4807.6 C87.1@3901.4,4716 ; CH7.2@4212.91,1345 4236.6,1368.69 C49.1@4236.6,1541 ; C85.1@4260.4,4714 4307.09,4760.69 CH16.2@4307.09,4920 ; CH13.2@4619.09,4920 4619.09,4885.91 4703.6,4801.4 C70.1@4703.6,4709 4703.6,4658.4 4871,4491 v1(4871,4477) ; CH6.2@4680.91,1345 4694.6,1358.69 C47.1@4694.6,1541 ; v1(4855,4212) 4904.76,4162.24 D4.1@5247,4162.24 5260.87,4148.36 Q2.3@5417.45,4148.36 5483.36,4148.36 v1(5485,4150) ; v1(4856,4035) 4922,3969 v1(4922,3755) ; C50.1@5228.4,4714 5228.4,4887.31 CH8.2@5261.09,4920 ; v1(5966,3361) 5983,3344 6360,3344 v1(6370,3354) ; C68.1@5971.4,1544 6022,1544 6054,1512 v1(6054,1482) ; C69.1@6250.4,1542 6276.81,1515.59 CH11.3@6276.81,1344 ; v1(6333,2679) 6455,2679 6512,2736 C80.1@6512,2759.6 6562.69,2708.91 CH15.2@6708,2708.91 ; C78.1@6512,3211.6 6544.69,3178.91 CH14.2@6708,3178.91 ; C71.1@6516,3577.4 6586.5,3647.91 CH12.2@6709,3647.91 ; C72.1@6517,3913.4 6662.4,3913.4 CH12.4@6709,3960 ; C73.1@6522,4248.4 6545.41,4271.81 CH12.6@6709,4271.81
  Bottom Layer w30: CH10.2@5885.09,4920 5885.09,4758.5 C52.1@5931.6,4712
  Bottom Layer w50: CH1.2@1521,2665.09 2220.91,2665.09 2339.09,2546.91 C1.2@2339.09,2447 ; CH3.2@2003.91,1344 2017.6,1357.69 C31.2@2017.6,1542
  other v2: 3549,1463 3699,1470 4107,1471 4939,1643 5108,1650 5091,1736 2102,2327 2184,2426 6460,2608 1896,2816 2149,2864 1894,2906 1772,2989 1888,2991 6470,3734 6596,3735 6527,4432 6695,4437 6615,4439 6338,4653 6337,4737 2602,4775 2734,4778 3236,4778 3368,4778 2990,4780 4942,4781 2856,4782 3112,4782 2074,4783 2217,4783 2350,4783 2467,4783 1947,4784 1818,4787 3491,4787 6331,4820 4940,4865 1824.31,4886 1952.85,4886 2081.38,4886 2209.92,4886 2338.46,4886 2467,4886 2595.54,4886 2724.08,4886 2852.62,4886 2981.15,4886 3109.69,4886 3238.23,4886 3366.77,4886 3495.31,4886 4933,4961 1825,4995 1953.85,4995 2082.69,4995 2211.54,4995 2340.38,4995 2469.23,4995 2598.08,4995 2726.92,4995 2855.77,4995 2984.61,4995 3113.46,4995 3242.31,4995 3371.15,4995 3500,4995
+3.3V: C6.2 C7.1 C8.1 C9.2 C10.2 C11.2 C20.2 C22.1 JP1.1 LED4.1 R2.2 R6.1 U2.2 U2.4 U3.13 U3.19 U3.32 U3.48 U3.64 U5.11 U5.14 U5.15 | length 10999.1
  Top Layer w10: LED4.1@3179,2836 3183.06,2840.06 3183.06,2884.06 ; R6.1@3183.06,2943 3183.06,2884.06 ; C8.1@3518.99,3515 3745,3515 3826.87,3433.13 U3.64@3826.87,3349.87 3826.87,3062.87 3806.78,3042.78 U3.13@3756,3042.78 3612.78,3042.78 3464,2894 3193,2894 3183.06,2884.06 ; v1(3610,2608) 3622,2608 3866.24,2852.24 U3.19@3866.24,2912.86 ; v1(3613,2522) 3670,2579 4140,2579 4190.4,2629.4 C10.2@4190.4,2662 4190.4,2719.4 v1(4241,2770) ; U3.32@4122.14,2912.86 4189.14,2912.86 4245,2857 v1(4245,2856.5) ; U3.48@4193.01,3279 4193.01,3299.01 4210,3316 v5(4432,3316)
  Top Layer w20: R2.2@1858.4,1853 1914,1853 1942,1881 1942,2053 2186,2297 2353,2297 2457,2401 2457,2732 v1(2463,2738) 2501,2776 2945,2776 2988,2733 3345,2733 v1(3416,2662) ; U5.11@2490,3951 2510,3931 U5.15@2590,3931 2719,3931 ; U5.14@2590,3651 2616,3625 2803,3625 2832,3654 2832,3818 2719,3931 ; C8.1@3518.99,3515 3517.4,3516.59 C9.2@3517.4,3626 3517.4,3815.6 3423.6,3909.4 C20.2@2942,3909.4 2920.4,3931 2719,3931 ; v3(3838,3727) 4192,3727 4232.4,3686.6 C11.2@4232.4,3596 4359,3596 4576,3379 4657,3379 4696,3340 4696,3177 4664.42,3145.42 JP1.1@4621,3145.42
  Top Layer w30: v1(3094,2889) 3094,2861 3119,2836 LED4.1@3179,2836
  Bottom Layer w10: v1(3610,2608) 3613,2605 v1(3613,2522) ; v1(4241,2770) 4245,2774 v1(4245,2856.5) ; v5(4432,3316) 4432,3209 4492.58,3148.42 4618,3148.42 JP1.1@4621,3145.42
  Bottom Layer w20: U2.2@2455,2843.95 2455,2746 v1(2463,2738) ; v1(3416,2662) 3473,2662 v1(3613,2522) ; v3(3520,3727) v3(3838,3727)
  Bottom Layer w30: U2.2@2455,2843.95 U2.4@2455,3088.05 2478.06,3064.99 C7.1@2684,3064.99 2690.59,3058.4 C6.2@2817,3058.4 2924.6,3058.4 v1(3094,2889)
+5V: C2.2 C3.1 C5.1 C35.2 C40.2 C45.2 C51.2 C57.2 C58.2 C65.2 C76.2 C83.2 R18.1 R20.1 R27.1 R28.1 R30.1 R31.1 R33.1 R35.1 R37.1 R38.1 R46.1 R48.1 R52.1 R54.1 R55.1 R56.1 R59.1 R60.1 R61.1 R62.1 R64.1 R66.1 R68.1 R69.1 R71.1 R72.1 R74.1 R88.2 R90.2 R91.2 R96.2 R98.2 R99.2 U1.5 U2.3 U9.12 U11.8 U15.8 U16.14 U16.16 U17.8 U18.14 U18.16 U19.14 U21.8 U22.8 U24.8 U32.10 U32.12 U32.14 U32.16 U33.8 U34.8 | length 25043.6
  Top Layer w20: R20.1@2702.4,1697 2766,1760.6 2766,1961 2801,1996 U11.8@2839.72,1996 2839.72,2343.72 2845,2349 ; U9.12@3245.11,1912 3389.6,1912 C35.2@3395.6,1906 ; R99.2@3630.6,3988 3538,3988 3498,4028 3498,4231 ; R96.2@3630.6,4272 3539,4272 3498,4231 ; v1(3793,2177) 3816,2200 v1(3816,2259) ; v1(3875,2528) C40.2@4364.6,2528 ; U34.8@4068.72,4221 4068.72,4296.72 4106,4334 C83.2@4220.6,4334 ; R33.1@4148.4,1698 4148.4,1645.6 4169,1625 R27.1@4362.6,1625 4362.6,1598.4 4391,1570 4598,1570 4747.4,1719.4 R30.1@4747.4,1755 4800,1755 4818,1773 v1(4818,1802) ; v1(4266,2388) 4265,2387 U16.14@4198.11,2387 4125,2387 4107,2405 4107,2477 4117,2487 U16.16@4198.11,2487 4203.31,2492.2 4342.8,2492.2 C40.2@4371.6,2521 C40.2@4364.6,2528 ; R98.2@4294.4,4240 4294.4,4250.6 4220.6,4324.4 C83.2@4220.6,4334 ; v1(4608,1990) 4593,1975 U15.8@4549.72,1975 4549.72,2089.72 4595,2135 C45.2@4672.6,2135 ; v1(4671,4310) 4506,4310 4399.6,4416.4 4220.6,4416.4 ; R31.1@4747.4,1945 4774,1945 v1(4818,1989) ; R28.1@4747.4,2325 4747.4,2422 C58.2@4746.4,2423 4780,2423 v1(4825,2378) 4825,2196 4889,2132 v1(4889,2105) ; v1(4764,2660) 4780,2676 U22.8@4845.72,2676 4896,2726.28 4896,2836 4863,2869 4595,2869 4571.6,2845.6 R56.1@4571.6,2817 4535.6,2781 4393,2781 4371.6,2759.6 R54.1@4371.6,2719 4352,2719 4316,2683 4316,2576.6 C40.2@4364.6,2528 ; R48.1@4949.6,4322 R48.1@4949.6,4315 ; v1(4950,4247) 4949.6,4247.4 R48.1@4949.6,4315 ; R62.1@5047.4,2654 5414.72,2654 U21.8@5458.72,2610 5458.72,2761.28 5366,2854 R55.1@5321.4,2854 ; U32.10@5073.11,3507 5003,3507 4991,3519 ; U32.12@5073.11,3607 5004,3607 4991,3594 ; U32.14@5073.11,3707 5012,3707 4991,3686 ; 5117,2647 5150,2614 5150,2489 5116,2455 R61.1@5040.4,2455 R66.1@5040.4,2359 5145,2359 5232,2272 R52.1@5271.6,2272 ; v1(5193,3807) U32.16@5073.11,3807 5020,3807 4991,3778 4991,3686 ; v1(5202,4019) 5206,4023 5206,4117 5185,4138 5069,4138 5052.6,4121.6 R46.1@5052.6,4085 4962.6,4085 C51.2@4940,4062.4 4940,4305.4 R48.1@4949.6,4315 ; v1(5335,4563) U18.16@5416.11,4563 5480,4563 5501,4542 5501,4475 5489,4463 U18.14@5416.11,4463 ; v1(5371,4028) 5403.11,4060.11 U19.14@5527,4060.11 ; v1(5565,2592) 5598,2559 5711,2559 5729.4,2540.6 R60.1@5729.4,2508 5790,2508 5811,2487 5811,2356 5762.2,2307.2 R59.1@5729.4,2307.2 ; v1(5571,2821) 5591,2801 C57.2@5651.6,2801 ; R88.2@5589.6,3206.25 5582.35,3199 5119,3199 4991,3327 4991,3519 ; 5589.6,3255 5590.6,3254 5862,3254 5957,3159 U33.8@6013.72,3159 6013.72,3274.72 6053,3314 6244,3314 6255.4,3302.6 R90.2@6255.4,3251 6338,3251 6382,3207 6382,2827 6316,2761 ; R64.1@5729.4,2006 5729.4,1968.6 5789.67,1908.33 5823.33,1908.33 ; v1(5743,1705) 5749,1711 R68.1@5848.6,1711 5848.6,1670.4 5875,1644 6165,1644 6211.4,1690.4 C65.2@6211.4,1708 v1(6211.4,1889) ; v1(5774,1859) 5823.33,1908.33 ; R69.1@5848.6,1908.33 5823.33,1908.33 ; v1(6237,2067) 6240,2070 U24.8@6324.72,2070 6384,2129.28 6384,2410 ; R91.2@6254.4,2761 6316,2761 ; R74.1@6575.4,1975 6647,1975 6686,2014 6686,2333 6654,2365 R72.1@6575.4,2365 6575.4,2421.6 6552,2445 6419,2445 6384,2410 ; R71.1@6575.4,2169.4 6643.4,2169.4 6681,2207 ; 3498,4231 3498,4418 3535,4455 4182,4455 4220.6,4416.4 ; C83.2@4220.6,4334 4220.6,4416.4 ; 4991,3519 4991,3594 ; 4991,3594 4991,3686 ; 6316,2761 6323,2761 6384,2700 6384,2410
  Top Layer w30: v1(2513,2654) 2532.93,2673.93 2582,2673.93 U1.5@2600,2655.93 2600,2592 ; 2845,2349 2845,2390 2786,2449 2688,2449 2600,2537 2600,2592 ; R18.1@3139.4,2533 3139.4,2621.6 3102,2659 3057,2659 2953,2555 2637,2555 2600,2592 ; R88.2@5589.6,3206.25 5589.6,3255 C76.2@5589.6,3304
  Bottom Layer w20: v1(2765,1772) 3068,1772 3112,1816 3272,1816 3324,1868 v1(3324,1914) 3381,1971 3381,2202 3468.67,2289.67 R37.1@3612.6,2289.67 R37.1@3612.6,2266.4 ; R38.1@3612.6,2192.33 R37.1@3612.6,2266.4 ; v1(3793,2177) 3729,2241 3638,2241 R37.1@3612.6,2266.4 ; v1@3876,2529 3816,2529 3752,2465 3752,2323 v1(3816,2259) U17.8@3887.28,2259 ; R35.1@4175.4,2364 4199.4,2388 v1(4266,2388) ; v1(4608,1990) 4818,1990 v1(4818,1989) ; v1(4671,4310) 4722,4361 4871,4361 4950,4282 v1(4950,4247) 5072,4247 5148,4323 5148,4489 5222,4563 v1(5335,4563) ; v1(4764,2660) 4764,2439 v1(4825,2378) 5126,2378 v1(5185,2319) ; v1(4818,1802) v1(4818,1989) ; v1(4889,2105) 4889,2034 4844,1989 v1(4818,1989) ; v1(5193,3807) 5193,4010 v1(5202,4019) 5362,4019 v1(5371,4028) ; v1(5461,2682) 5475,2682 v1(5565,2592) 5565,2815 v1(5571,2821) ; v1(5743,1705) 5743,1828 v1(5774,1859) ; v1(5809,2487) 5809,2522 5887,2600 6137,2600 6237,2500 v1(6237,2067) 6212,2042 6212,1889.6 v1(6211.4,1889)
  Bottom Layer w30: U2.3@2364.45,2843.95 2364.45,2733.55 2445,2653 C5.1@2759.01,2653 2757.6,2654.41 C2.2@2757.6,2773
+24V: C1.1 C4.2 C30.1 CH3.1 CH6.1 CH7.1 CH8.1 CH14.1 CH15.1 CH16.1 CH17.1 D3.2 F1.2 Q1.3 R1.2 R13.2 R15.1 R22.2 R23.2 R26.1 R32.1 R44.1 R49.1 R50.1 R51.1 R53.1 R63.1 R65.1 R67.1 R73.1 R75.1 R76.1 R79.1 R80.1 R83.1 R84.1 U1.2 U8.1 U8.2 U8.3 U10.1 U10.2 U10.3 U12.1 U12.2 U12.3 U13.1 U13.2 U13.3 U25.1 U25.2 U25.3 U26.1 U26.2 U26.3 U27.1 U27.2 U27.3 U28.1 U28.2 U28.3 U30.1 U30.2 U30.3 U31.1 U31.2 U31.3 | length 30328.6
  Top Layer w20: R1.2@1857.4,1975 C4.2@1857.4,2092 2032,2266.6 C1.1@2032,2447 ; v1(2978,1687) 3006,1715 v1(3324,1715) 3330,1709 R32.1@3394.6,1709 R26.1@3394.6,1807 3331,1807 v1(3330,1806) ; v1(3438,2171) 3469.4,2139.6 R13.2@3469.4,2103 3469.4,2006 R15.1@3470.4,2005 ; R23.2@4145.4,1904 4145.4,2001 R22.2@4144.4,2002 4187,2002 v1(4227,1962) ; CH6.1@4525,1345 4525,1441 4596,1512 4716,1512 4964.6,1760.6 R65.1@4964.6,1837 4965.6,1838 R63.1@4965.6,1935 R51.1@4965.6,2131 ; U27.1@4623,4391 U27.2@4673,4391 ; v1(4712,4467) 4673,4428 U27.2@4673,4391 ; U27.3@4723,4391 U27.2@4673,4391 ; R44.1@4949.6,4421 4949.6,4469.6 v1(4950,4470) ; CH8.1@5417,4920 5417,4825 5509,4733 5609,4733 5747,4595 5747,4380 5722,4355 R49.1@5668.4,4355 ; R50.1@5669.4,4257 5901,4257 v1(5933,4225) 5933,4057 6032,3958 v1(6189,3958) v1(6189,3775) 6225,3775 6263.4,3736.6 R79.1@6263.4,3695 6259.4,3691 R83.1@6259.4,3498 R84.1@6259.4,3395 6273,3395 6429,3239 6429,3050 6456,3023 CH14.1@6708,3023 ; R73.1@6008.4,2813 R67.1@6008.4,2707 6027.4,2688 v1(6266,2688)
  Top Layer w30: R75.1@6579.4,1677 6577.4,1679 R76.1@6577.4,1775 6631,1775 v1(6667,1739)
  Top Layer w50: C1.1@2032,2447 2032,3113 2066,3113 2247,2932 2736,2932 2800,2996 U1.2@2800,3089
  Bottom Layer w20: C30.1@1795.6,1541 1795.6,1600.6 1940,1745 U8.1@1940,1840 U8.2@1990,1840 ; C30.1@1805.6,1541 1805.6,1386.4 CH3.1@1848,1344 ; U8.3@2040,1840 U8.2@1990,1840 ; U10.1@2207,1841 U10.2@2257,1841 ; U10.3@2307,1841 U10.2@2257,1841 ; U12.3@2906,1569 U12.1@2906,1669 ; v1(2978,1687) 2960,1669 U12.1@2906,1669 ; v1(3324,1715) 3402,1715 3428,1689 ; v1(3330,1806) 3421,1897 3421,2154 v1(3438,2171) ; U13.3@3430,1573 U13.2@3430,1623 U13.1@3430,1673 ; CH7.1@4057,1345 4057,1403 3995,1465 3995,1730 v1(4227,1962) ; CH16.1@4463,4920 4473,4920 4645,4748 4645,4629 4712,4562 v1(4712,4467) 4758,4421 4926,4421 4950,4445 v1(4950,4470) ; D3.2@5768,4182.24 5801.87,4148.36 Q1.3@5935.45,4148.36 5935.45,4222.55 v1(5933,4225) 5979,4271 6225,4271 6260,4306 U31.1@6260,4345 U31.2@6310,4345 U31.3@6360,4345 ; U25.3@6019,1707 U25.2@6019,1757 U25.1@6019,1807 6019,1821 6053,1855 6331,1855 U26.1@6376,1810 ; v1(6189,3775) 6206,3775 6254,3727 U28.1@6254,3682 U28.2@6304,3682 U28.3@6354,3682 ; v1(6189,3958) 6199,3958 U30.1@6255,4014 U30.2@6305,4014 U30.3@6355,4014 ; v1(6266,2688) 6401,2553 CH15.1@6708,2553 ; U26.3@6376,1710 U26.2@6376,1760 U26.1@6376,1810 ; v1(6667,1739) 6667,1678 6586,1597 6349,1597 6290,1656 6290,1784 6316,1810 U26.1@6376,1810 ; U8.2@1990,1840 1990,1791 2022,1759 2225,1759 2257,1791 2257,1794 ; 2257,1794 2325,1726 2860,1726 2906,1680 U12.1@2906,1669 ; 2257,1794 U10.2@2257,1841
  Bottom Layer w30: U31.1@6260,4345 6260,5013
  Bottom Layer w50: CH3.1@1848,1344 1848,1207.4 ; C1.1@2032,2447 1986,2447 1700.5,2161.5 1700.5,1297.5 1790.6,1207.4 1848,1207.4 ; CH17.1@3995,4920 3995,5020 4017,5042 4480,5042 ; CH7.1@4057,1345 4060,1342 4060,1207.4 ; CH16.1@4463,4920 4463,5025 4480,5042 ; CH6.1@4525,1345 4525,1207.4 ; CH8.1@5417,4920 5417,5036 5423,5042 ; v1(6667,1739) 6677,1729 6765,1729 6765,2496 CH15.1@6708,2553 6773,2553 6836,2616 ; 1848,1207.4 4060,1207.4 ; 4060,1207.4 4525,1207.4 ; 4480,5042 5423,5042 ; 4525,1207.4 6505.4,1207.4 6553,1255 6553,1462 6836,1745 6836,2616 ; 5423,5042 6231,5042 6260,5013 6839,4434 6839,2619 6836,2616
+24V_IN: CH1.1 CH1.3 F1.1 | length 897.2
  Top Layer w50: CH1.3@1521,2509.19 1633,2509.19 1686,2562.19 1686,2745 1610,2821 ; CH1.1@1521,2821 1610,2821 ; F1.1@1663,3130 1663,2874 1610,2821
AIR_BLOW_IN: R85.1 U3.51 | length 1636.5
  Top Layer w10: U3.51@4082.77,3349.87 4082.77,3419.77 4103,3440 4354,3440 v1(4385,3409)
  Top Layer w20: v1(5514,3455) 5559.5,3500.5 R85.1@5588.6,3500.5
  Bottom Layer w20: v1(4385,3409) 4387,3407 5466,3407 v1(5514,3455)
AIR_BLOW_OUT: C72.2 CH12.3 U30.5 U30.6 U30.7 U30.8 | length 480.6
  Bottom Layer w20: U30.8@6255,3809.28 U30.7@6305,3809.28 U30.6@6355,3809.28 U30.5@6405,3809.28 6487.68,3809.28 C72.2@6517,3838.6 6551.79,3803.81 CH12.3@6709,3803.81
AIR_CYLINDER_IN: R82.1 U3.52 | length 1697.4
  Top Layer w10: U3.52@4063.09,3349.87 4063.09,3435.09 4104,3476 v1(4361,3476)
  Top Layer w20: v1(5515,3557) 5556.25,3598.25 R82.1@5588.6,3598.25
  Bottom Layer w20: v1(4361,3476) 4384,3453 5411,3453 v1(5515,3557)
AIR_CYLINDER_OUT: C71.2 CH12.1 U28.5 U28.6 U28.7 U28.8 | length 469.9
  Bottom Layer w20: U28.8@6254,3477.28 U28.7@6304,3477.28 U28.6@6354,3477.28 U28.5@6404,3477.28 6490.68,3477.28 C71.2@6516,3502.6 6698.4,3502.6 CH12.1@6709,3492
BAFFLE_INTER: C86.2 R102.2 U32.9 U34.6 | length 1829.9
  Top Layer w20: U34.6@4068.72,4121 4126,4121 4198,4049 C86.2@4220.6,4049 4220.6,3978.4 v3(4225,3974) ; v1(5160,3488) 5160,3482 5135,3457 U32.9@5073.11,3457 5121.11,3409 R102.2@5224.6,3409
  Bottom Layer w20: v3(4225,3974) 4349,3850 4349,3576 4437,3488 v1(5160,3488)
BAFFLE_INTER_IN: C87.2 CH17.3 R100.1 | length 1977.8
  Top Layer w20: v1(4531,3560) 4531,3546 4580,3497 R100.1@4613.6,3497
  Bottom Layer w20: CH17.3@3683.19,4920 3683.19,4822.81 3790,4716 C87.2@3826.6,4716 3826.6,4656.4 3884,4599 4103,4599 4486,4216 4486,3605 v1(4531,3560)
BAFFLE_OUT: C70.2 CH13.1 U27.5 U27.6 U27.7 U27.8 | length 687.5
  Top Layer w20: U27.8@4623,4595.72 U27.7@4673,4595.72 U27.6@4723,4595.72 U27.5@4773,4595.72 4773,4918 CH13.1@4775,4920
  Bottom Layer w20: CH13.1@4775,4920 4778.4,4916.6 C70.2@4778.4,4709
BAFFLE_OUTER: C84.1 R97.2 U32.11 U34.2 | length 2208.9
  Top Layer w20: C84.1@3705.4,4177 3711.4,4171 U34.2@3864,4171 3953,4171 v3(3955,4173) ; U32.11@5073.11,3557 5222.6,3557 R97.2@5224.6,3559
  Bottom Layer w20: v3(3955,4173) 4007,4225 4215,4225 4400,4040 4400,3574 4454,3520 5045,3520 5084,3559 v1(5156,3559)
BAFFLE_OUTER_IN: C85.2 CH16.3 R95.1 | length 1547.8
  Top Layer w20: CH16.3@4150,4918.81 CH16.3@4151.19,4920 ; v1(4536,3642) 4536,3623 4565.33,3593.67 R95.1@4613.6,3593.67
  Bottom Layer w20: CH16.3@4151.19,4920 4151.19,4748.41 C85.2@4185.6,4714 4185.6,4627.4 4536,4277 v1(4536,3642)
CPU1_FOR_CPU2_1: C82.1 R98.1 U3.44 U34.7 | length 1489.9
  Top Layer w10: U3.44@4193.01,3200.26 4293.74,3200.26 v1(4330,3164)
  Top Layer w20: U34.7@4068.72,4171 4137,4171 v3(4141,4167) 4197.6,4167 C82.1@4219.6,4145 R98.1@4219.6,4240
  Bottom Layer w20: v3(4141,4167) 4141,3353 v1(4330,3164)
CPU1_FOR_CPU2_2: R81.1 U3.45 | length 2394.8
  Top Layer w10: U3.45@4193.01,3219.94 4381.06,3219.94 v1@4394,3207
  Top Layer w20: v3(4208,3816) 4284,3892 5241,3892 5437,3696 R81.1@5588.6,3696
  Bottom Layer w20: v3(4208,3816) 4203,3811 4203,3393 v1(4394,3202)
CPU1_FOR_CPU2_3: C81.1 R96.1 U3.61 U34.1 | length 1249.4
  Top Layer w10: U3.61@3885.92,3349.87 3885.92,3496.92 v1(3905,3516)
  Top Layer w20: C81.1@3705.4,4367 R96.1@3705.4,4272 3707.4,4270 v3(3865,4270) 3864,4269 U34.1@3864,4221
  Bottom Layer w20: v3(3865,4270) 3905,4230 v1(3905,3516)
CPU1_NET_RST: U3.41 U5.4 | length 2227.2
  Top Layer w10: v1(3984,3131) 3994.2,3141.2 U3.41@4193.01,3141.2
  Top Layer w20: U5.4@2390,3831 2391,3830 2702,3830 2771,3761 v1(2771,3683)
  Bottom Layer w10: v1(2771,3683) 2771,3539 2976,3334 3770,3334 3973,3131 v1(3984,3131)
CPU1_USART1_RXD: U3.43 U5.9 | length 2035.2
  Top Layer w10: v1(3984,3232) 4035.43,3180.57 U3.43@4193.01,3180.57
  Bottom Layer w15: U5.9@2490,3711 2524,3745 2829,3745 2889,3685 2889,3541 3051,3379 3837,3379 v1(3984,3232)
CPU1_USART1_TXD: U3.42 U5.8 | length 2058.6
  Top Layer w10: v1(3978,3183) 4000.11,3160.89 U3.42@4193.01,3160.89
  Bottom Layer w15: U5.8@2490,3631 2576,3717 2810,3717 2850,3677 2850,3524 3020,3354 3807,3354 v1(3978,3183)
CPU_CONTROL_ROLL: R46.2 R47.1 U3.23 U19.5 | length 3268.6
  Top Layer w10: U3.23@3944.98,2912.86 3944.98,3013.98 3986,3055 v1(4073,3055)
  Top Layer w15: R47.1@5128.4,3982 5180.4,3930 5280,3930 5461,3749 5727,3749 v1(5728,3748)
  Top Layer w20: R46.2@5127.4,4085 5127.4,3983 R47.1@5128.4,3982 ; v1@5727,3749 U19.5@5727,3823.89
  Bottom Layer w20: v1(4073,3055) 5008,3055 5279,3326 5657,3326 5728,3397 v1(5728,3748)
DIR11_IN: R16.1 U3.59 | length 1386.8
  Top Layer w10: v1(3869,3179) 3869,3226 3925.29,3282.29 U3.59@3925.29,3349.87
  Top Layer w20: R16.1@3063.6,2433 3063.6,2460.6 3087,2484 3218,2484 3320,2586 v1(3320,2692)
  Bottom Layer w20: v1(3320,2692) 3321,2692 3808,3179 v1(3869,3179)
DIR11_OUT: C32.2 CH3.4 U10.5 U10.6 U10.7 U10.8 | length 466.7
  Bottom Layer w20: U10.8@2207,1636.28 U10.7@2257,1636.28 ; CH3.4@2316,1344 2267.6,1392.4 C32.2@2267.6,1542 2257,1552.6 U10.7@2257,1636.28 ; U10.5@2357,1636.28 U10.6@2307,1636.28 U10.7@2257,1636.28
ER11: C34.1 R19.2 U9.11 U11.2 | length 909.7
  Top Layer w20: C34.1@2491.4,1797.33 2490.4,1798.33 R19.2@2490.4,1896.67 2510.67,1896.67 2560,1946 U11.2@2635,1946 2713,1946 v1(2717,1942) ; v1(3148,1862) U9.11@3245.11,1862
  Bottom Layer w20: v1(2717,1942) 2797,1862 v1(3148,1862)
ERR11_IN: CH3.5 R17.1 | length 583
  Top Layer w20: CH3.5@2471.91,1344 2471.91,1417.91 2538,1484 2688,1484 2812.6,1608.6 R17.1@2812.6,1698
ERR11_OUT: C33.1 R18.2 U3.57 U11.1 | length 2580.7
  Top Layer w10: R18.2@3064.6,2530 3066,2531.4 v1(3066,2593) ; v1(3933,3121) 3938,3126 3938,3230 3964.66,3256.66 U3.57@3964.66,3349.87
  Top Layer w20: U11.1@2635,1996 2493.4,1996 C33.1@2491.4,1994 2491.4,2129.4 2569,2207 v1(2762,2207)
  Bottom Layer w10: v1(3066,2593) 3295,2593 3823,3121 v1(3933,3121)
  Bottom Layer w20: v1(2762,2207) 2924,2207 3066,2349 v1(3066,2593)